# EAGLE board zero-hm-10-breakout (EAGLE 7.2.0)
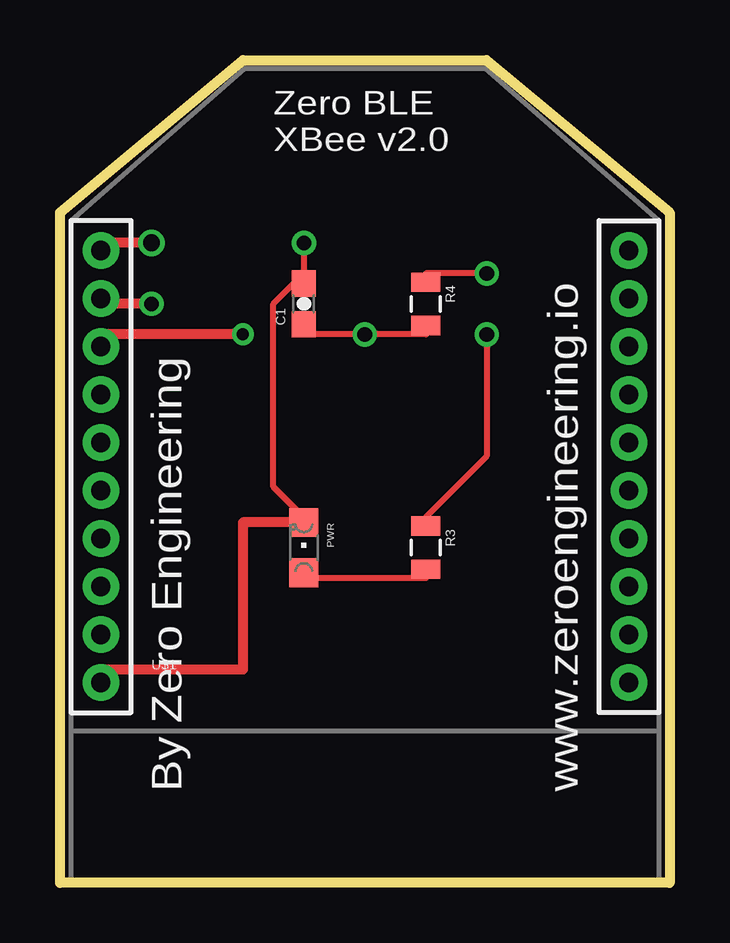
[diagram p0: board, top side]
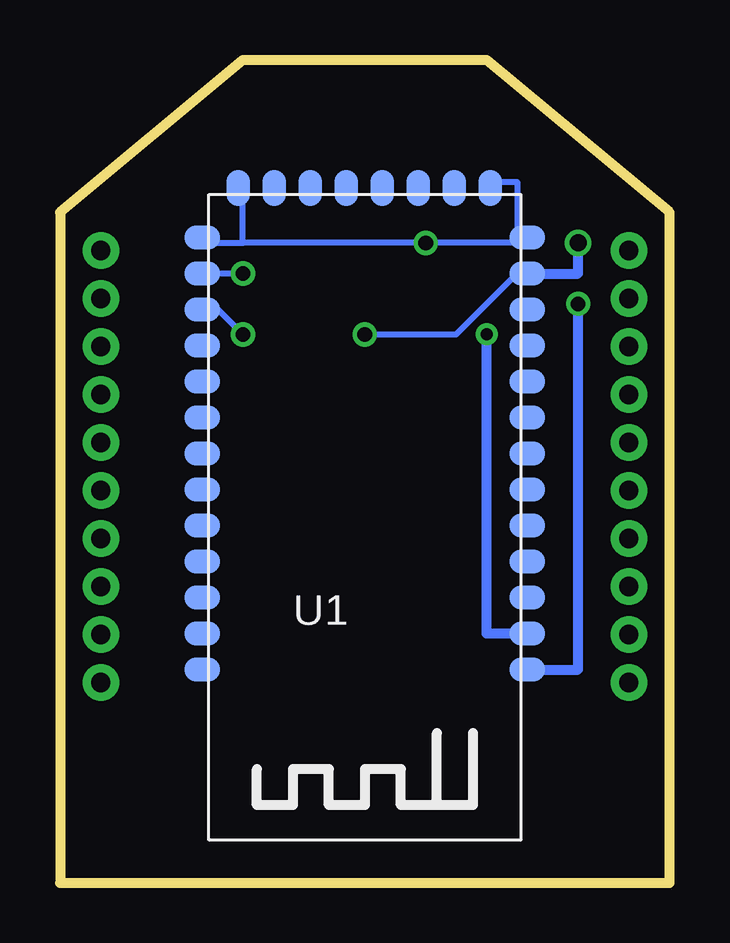
[diagram p1: board, bottom side, seen from below]

Size 25.4 x 34.29 mm. Coordinates in mm from the lower left corner, seen from the top.
Outline: 0,27.94 7.62,34.29 17.78,34.29 25.4,27.94 25.4,0 0,0 0,27.94
Copper layers (1*16): Top 0.035mm / dielectric 1.5mm / Bottom 0.035mm
Design rules "default": minimum track width 10mil, minimum drill 24mil, track to track 8mil, track to pad 8mil, pad to pad 8mil, via to via 8mil, smd to smd 8mil, copper to edge 40mil, drill to drill 8mil, minimum pad ring 10mil, minimum via ring 8mil, stop-mask expansion 4mil, vias tented up to drill 0mil, thermal gap 10mil
Milling: 5 lines

## Footprints (pad centres in the part's own frame; a part is rotated, then mirrored left to right if it is on the bottom)
0603-CAP = smd 1.1 x 1: 1 -0.85,0; 2 0.85,0
CHIPLED_0805 = smd 1.2 x 1.2: A 0,-1.05; C 0,1.05
0805 = smd 0.8 x 1.2: 1 -0.9,0; 2 0.9,0
HM-10 = smd 1.5 x 1: 1 -6.77,6.35; 2 -6.77,4.85; 3 -6.77,3.35; 4 -6.77,1.85; 5 -6.77,0.35; 6 -6.77,-1.15; 7 -6.77,-2.65; 8 -6.77,-4.15; 9 -6.77,-5.65; 10 -6.77,-7.15; 11 -6.77,-8.65; 12 -6.77,-10.15; 13 -6.77,-11.65; 22 6.77,-11.65; 23 6.77,-10.15; 24 6.77,-8.65; 25 6.77,-7.15; 26 6.77,-5.65; 27 6.77,-4.15; 28 6.77,-2.65; 29 6.77,-1.15; 30 6.77,0.35; 31 6.77,1.85; 32 6.77,3.35; 33 6.77,4.85; 34 6.77,6.35 | smd 1 x 1.5: 14 -5.23,-13.72; 15 -3.73,-13.72; 16 -2.23,-13.72; 17 -0.73,-13.72; 18 0.77,-13.72; 19 2.27,-13.72; 20 3.77,-13.72; 21 5.27,-13.72
XBEE-1 = drill 0.8 pad 1.524: 1 -11,20; 2 -11,18; 3 -11,16; 4 -11,14; 5 -11,12; 6 -11,10; 7 -11,8; 8 -11,6; 9 -11,4; 10 -11,2; 11 11,2; 12 11,4; 13 11,6; 14 11,8; 15 11,10; 16 11,12; 17 11,14; 18 11,16; 19 11,18; 20 11,20

## Placement (x,y rotation side)
C1  0.1uF  [0603-CAP]  10.16,24.13 90 top
PWR  BLU  [CHIPLED_0805]  10.16,13.97 0 top
R3  470R  [0805]  15.24,13.97 270 top
R4  470R  [0805]  15.24,24.13 270 top
U1  HM-10  [HM-10]  12.7,15.24 180 bottom
U$1  XBEE-1B1  [XBEE-1]  12.7,6.35 0 top

## Library data of the parts
C1 = SparkFun-Capacitors; PROD_ID: CAP-00810
PWR = adafruit
R3 R4 = SparkFun-Resistors; PROD_ID: RES-11622
U1 = HM-10_BLE
U$1 = SparkFun-RF

## Nets
GND: C1.2 PWR.C U1.13 U1.14 U1.21 U1.22 U$1.10
N$3: PWR.A R3.2
N$4: R3.1 U1.24
N$5: R4.1 U1.23
RX: U1.1 U$1.2
TX: U1.2 U$1.3
VDD: C1.1 R4.2 U1.12 U$1.1

## Tracks (layer width: path | path; a pad name or v marks a point on that pad's centre or on a via)
GND  (via drill 0.61)
  Top 0.254: 10.16,25.4 8.89,24.13 8.89,16.51 10.16,15.24 PWR.C | v10.16,26.67 10.16,25.4 | 10.16,25.4 C1.2
  Top 0.406: PWR.C 7.62,15.02 7.62,8.89 1.7,8.89 U$1.10
  Bottom 0.254: 17.78,26.67 17.78,29.21 U1.21 | 17.78,26.67 19.05,26.67 U1.22 | 6.35,26.67 6.35,29.21 7.62,29.21 U1.14 | 6.35,26.67 v10.16,26.67 17.78,26.67 | 6.35,26.67 U1.13
N$3
  Top 0.254: PWR.A 10.16,12.7 15.24,12.7 R3.2
N$4  (via drill 0.61)
  Top 0.254: v17.78,22.86 17.78,17.78 15.24,15.24 R3.1
  Bottom 0.254: v17.78,22.86 19.05,24.13 U1.24
N$5  (via drill 0.61)
  Top 0.254: v17.78,25.4 15.24,25.4 R4.1
  Bottom 0.254: v17.78,25.4 19.05,25.4 U1.23
RX  (via drill 0.6)
  Top 0.406: v3.81,24.13 1.7,24.13 U$1.2
  Bottom 0.406: U1.1 3.81,8.89 v3.81,24.13
TX  (via drill 0.5)
  Top 0.406: v7.62,22.86 1.7,22.86 U$1.3
  Bottom 0.406: U1.2 7.62,10.39 v7.62,22.86
VDD  (via drill 0.61, 0.7)
  Top 0.254: C1.1 10.16,22.86 v12.7,22.86 15.24,22.86 R4.2
  Top 0.406: v3.81,26.67 1.7,26.67 U$1.1
  Bottom 0.254: v12.7,22.86 8.89,22.86 6.35,25.4 U1.12
  Bottom 0.406: U1.12 3.81,25.39 v3.81,26.67

## Text on the board
tPlace: Zero BLE / XBee v2.0 | By Zero Engineering | www.zeroengineering.io